# EAGLE board Nepixel_MIC_1_ESP8266_12 (EAGLE 6.3)
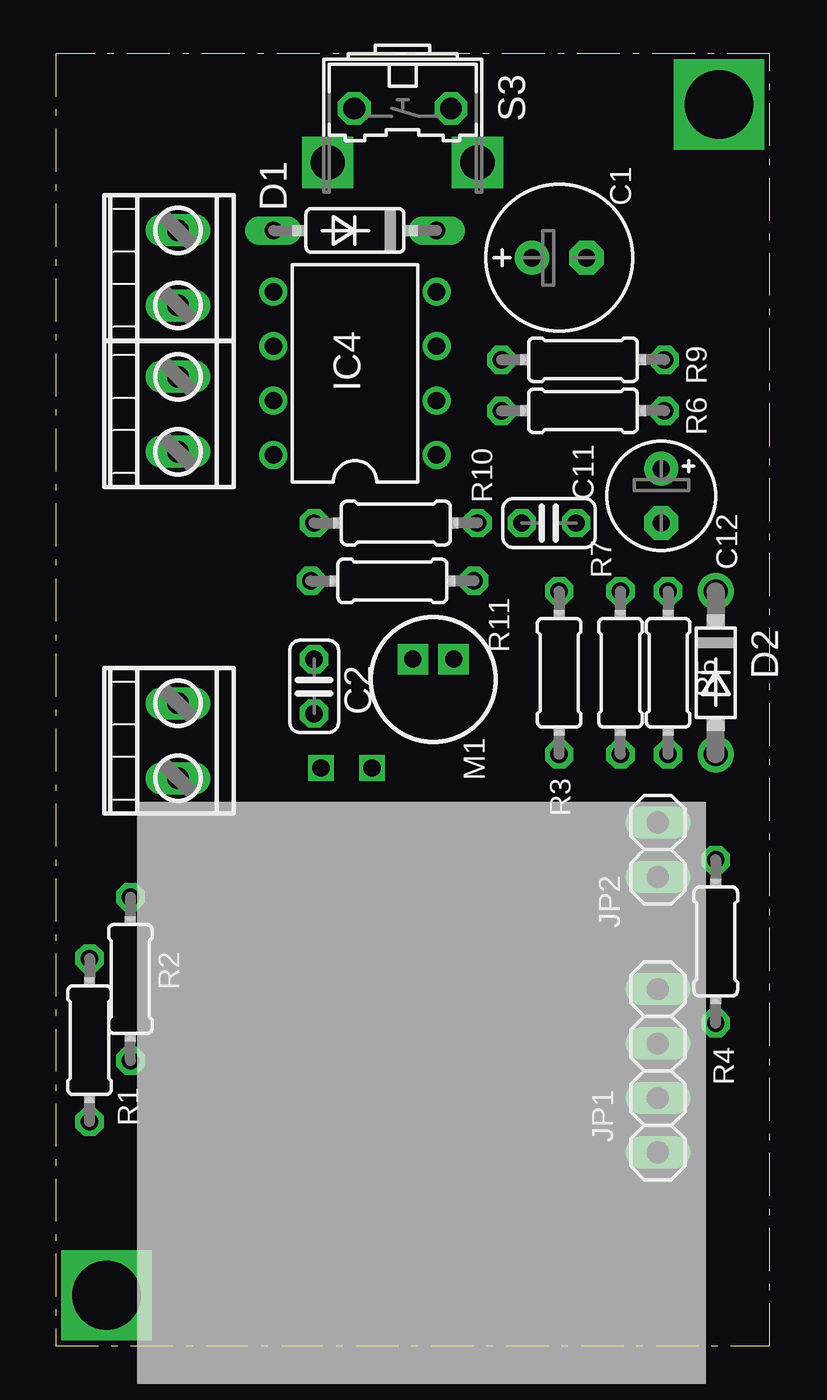
[diagram p0: board, top side]
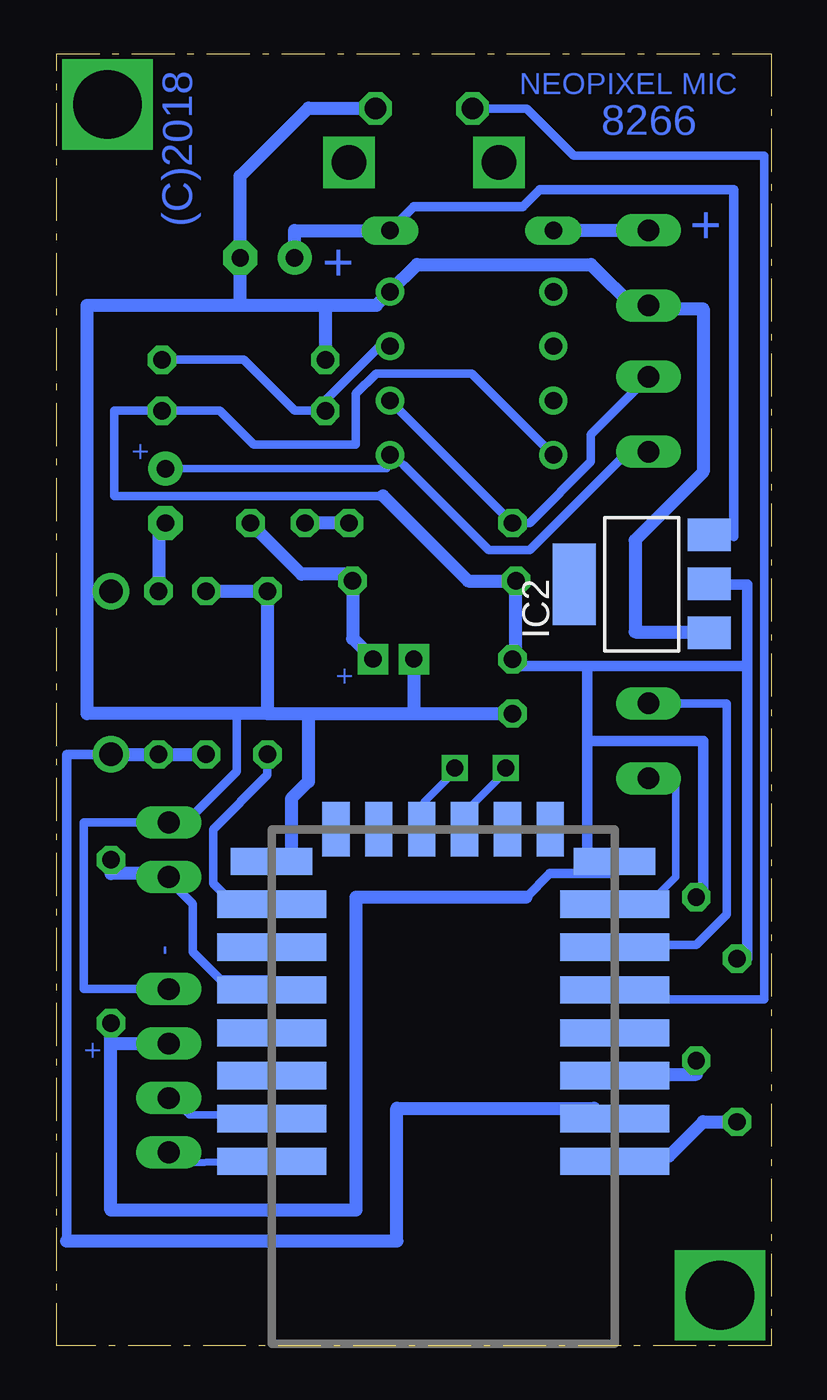
[diagram p1: board, bottom side, seen from below]

Size 33.33 x 60.3 mm. Coordinates in mm from the lower left corner, seen from the top.
Outline: 0,60.3 0,0 33.33,0 33.33,60.3 0,60.3
Copper layers (1*16): Top 0.035mm / dielectric 1.5mm / Bottom 0.035mm
Design rules "default *": minimum track width 14mil, minimum drill 24mil, track to track 8mil, track to pad 8mil, pad to pad 8mil, via to via 8mil, smd to smd 8mil, copper to edge 8mil, drill to drill 8mil, minimum pad ring 10mil, minimum via ring 8mil, stop-mask expansion 4mil, vias tented up to drill 0mil, thermal gap 10mil

## Footprints (pad centres in the part's own frame; a part is rotated, then mirrored left to right if it is on the bottom)
E2,5-7 = drill 0.813 pad 1.6: + -1.27,0 | drill 0.813 pad 1.6 octagon: - 1.27,0
C025-024X044 = drill 0.813 octagon: 1 -1.27,0; 2 1.27,0
E2,5-5 = drill 0.813 pad 1.6: + -1.27,0 | drill 0.813 pad 1.6 octagon: - 1.27,0
DO35-7 = drill 0.813 long: A 3.81,0; C -3.81,0
DO41-7.6 = drill 1.1 pad 1.7: A 3.81,0; C -3.81,0
SOT223 = smd 1.499 x 2.007: 1 -2.261,-3.15; 2 0.025,-3.15; 3 2.311,-3.15 | smd 3.81 x 2.007: 4 0,3.15
DIL08 = drill 0.813 pad 1.27: 1 -3.81,-3.81; 2 -1.27,-3.81; 3 1.27,-3.81; 4 3.81,-3.81; 5 3.81,3.81; 6 1.27,3.81; 7 -1.27,3.81; 8 -3.81,3.81
1X04 = drill 1.016 long: 1 -3.81,0; 2 -1.27,0; 3 1.27,0; 4 3.81,0
1X02 = drill 1.016 long: 1 -1.27,0; 2 1.27,0
WM-64PN = drill 0.6 pad 1: 1 -1,0.95; 2 -1,-0.95
0204/7 = drill 0.813 octagon: 1 -3.81,0; 2 3.81,0
B3F-31XX = drill 1.016 octagon: 1 -2.261,-1.245; 2 2.261,-1.245 | drill 1.499 pad 2.159: 3 -3.505,1.245; 4 3.505,1.245
ESP826612F = smd 5.08 x 1.27: ADC 0,13.5; EN 0,11.5; GPIO0 16,7.5; GPIO2 16,5.5; GPIO4 16,9.5; GPIO5 16,11.5; GPIO12 0,5.5; GPIO13 0,3.5; GPIO14 0,7.5; GPIO15 16,3.5; GPIO16 0,9.5; RST 0,15.5; RXD 16,13.5; TXD 16,15.5 | smd 1.27 x 2.54: CSO 3,0; GPIO9 7,0; GPIO10 9,0; MISO 5,0; MOSI 11,0; SCLK 13,0 | smd 3.81 x 1.27: GND 16,1.5; VCC 0,1.5
AK550/2 = drill 1 pad 1.5 long: 1 -1.75,0; 2 1.75,0

## Placement (x,y rotation side)
C1  330uF/6.3  [E2,5-7]  23.5,50.78 0 top
C2  M1  [C025-024X044]  12.06,30.78 270 top
C11  M1  [C025-024X044]  23.02,38.4 180 top
C12  4M7  [E2,5-5]  28.26,39.67 270 top
D1  BA159  [DO35-7]  13.97,52.05 180 top
D2  KA261  [DO41-7.6]  30.8,31.41 270 top
IC2  REG1117  [SOT223]  6.03,35.54 90 bottom
IC4  LM358N  [DIL08]  13.97,45.38 90 top
JP1  [1X04]  28.1,12.84 90 top
JP2  [1X02]  28.1,23.16 90 top
M1  mic  [WM-64PN]  17.62,31.09 270 top
R1  10k  [0204/7]  1.59,14.27 90 top
R2  10k  [0204/7]  3.49,17.12 90 top
R3  10k  [0204/7]  23.5,31.41 270 top
R4  10k  [0204/7]  30.8,18.87 90 top
R5  100k  [0204/7]  28.57,31.41 270 top
R6  10k  [0204/7]  24.61,43.64 0 top
R7  100k  [0204/7]  26.35,31.41 270 top
R9  10k  [0204/7]  24.61,46.02 0 top
R10  1k  [0204/7]  15.88,38.4 0 top
R11  10k  [0204/7]  15.72,35.7 180 top
S3  [B3F-31XX]  16.19,56.49 180 top
U$1  ESP826612F  [ESP826612F]  7.3,24.11 180 bottom
X1  UCC  [AK550/2]  5.71,50.3 270 top
X3  OUT  [AK550/2]  5.71,28.24 270 top
X4  pot1  [AK550/2]  5.71,43.48 270 top

## Library data of the parts
C1 C2 C11 C12 R1-R7 R9-R11 = resistor
D1 D2 = diode
IC2 = burr-brown; MPN: REG1117; OC_FARNELL: 1097566; OC_NEWARK: 14P6981
IC4 = linear
JP1 JP2 = pinhead
M1 = microphon
S3 = switch-omron; MPN: B3F-3100; OC_FARNELL: 959704; OC_NEWARK: 36M3582
U$1 = ESP8266
X1 X3 X4 = con-ptr500; OC_FARNELL: unknown; OC_NEWARK: unknown

## Nets
GND: C1.- C2.2 D2.C IC2.1 IC4.4 JP1.4 JP2.2 M1.2 R3.1 R7.1 R9.1 S3.1 U$1.GND X1.2
N$1: D1.A X1.1
N$2: S3.2 U$1.GPIO14
N$4: JP1.1 U$1.TXD
N$5: JP1.2 U$1.RXD
N$7: JP2.1 R4.2 U$1.GPIO0
N$8: U$1.GPIO13 X3.2
N$9: R1.1 U$1.RST
N$10: U$1.GPIO12 X3.1
N$11: R2.1 U$1.EN
N$12: R3.2 U$1.GPIO15
N$15: C12.- R5.1
N$21: C1.+ D1.C IC2.3
N$25: C2.1 IC2.2 IC4.8 JP1.3 R1.2 R2.2 R4.1 R6.2 R11.2 U$1.VCC
N$61: IC4.2 R10.1 X4.1
N$62: IC4.3 R6.1 R9.2
N$63: C11.2 R10.2
N$64: C11.1 M1.1 R11.1
N$65: D2.A R5.2 R7.2 U$1.ADC
N$66: C12.+ IC4.1 X4.2

## Tracks (layer width: path | path; a pad name or v marks a point on that pad's centre or on a via)
GND
  Bottom 0.356: 4.92,48.4 X1.2 | 22.38,22.84 23.18,22.84 U$1.GND | 18.41,57.76 S3.1 | 2.54,33.32 IC2.1 2.86,33.32 | 16.67,31.73 16.64,31.58 | 16.64,31.58 16.67,32.21 | M1.2 16.64,31.62 16.64,31.58 | 31.91,35.22 D2.C
  Bottom 0.406: JP1.4 32.07,16.65 32.07,24.43 JP2.2 27.3,24.43 24.92,26.81 24.92,29.51
  Bottom 0.6: 16.67,32.21 16.67,29.51 | 21.59,26.33 21.59,29.51 23.5,29.51
  Bottom 0.61: 20.8,48.56 18.41,48.56 IC4.4 16.51,50.46 8.41,50.46 6.35,48.4 4.92,48.4 3.17,48.4 3.17,40.78 6.35,37.6 6.35,33.32 2.86,33.32 | 24.77,48.56 20.8,48.56 | 20.8,48.56 R9.1 | 21.59,26.33 22.38,25.54 22.38,22.84 | 21.59,29.51 16.67,29.51 C2.2 | R7.1 R3.1 23.5,29.51 24.92,29.51 31.91,29.51 31.91,35.22 31.91,48.56 24.77,48.56 | 24.77,48.56 C1.- 24.77,54.59 21.59,57.76 18.41,57.76
N$1
  Bottom 0.356: X1.1 5.87,52.05
  Bottom 0.61: 5.87,52.05 D1.A
N$2
  Bottom 0.356: 4.76,16.17 5.4,16.81 7.11,16.81 U$1.GPIO14
  Bottom 0.406: S3.2 11.4,57.74 9.21,55.54 0.32,55.54 0.32,16.17 4.76,16.17
N$3  (via drill 0.8)
  other vias: 14.76,26.97
N$4
  Bottom 0.356: JP1.1 27.94,8.55 U$1.TXD
N$5
  Bottom 0.356: JP1.2 27.15,10.78 25.72,10.78 U$1.RXD
N$6  (via drill 0.8)
  other vias: 12.38,26.97
N$7
  Bottom 0.356: 28.42,22.05 JP2.1 28.1,22.05 | 25.72,17.12 23.5,17.12 23.5,16.81 U$1.GPIO0
  Bottom 0.406: 28.42,22.05 26.99,20.62 26.99,18.39 25.72,17.12
  Bottom 0.61: 28.1,22.05 30.8,22.05 R4.2
N$8
  Bottom 0.356: X3.2 5.4,26.33 4.45,26.33 4.45,21.89 5.4,20.93 6.03,20.93 6.03,20.62 U$1.GPIO13
N$9
  Bottom 0.356: 4.76,8.87 5.08,8.87 7.3,8.55 U$1.RST
  Bottom 0.61: 4.76,8.87 3.17,10.46 R1.1
N$10
  Bottom 0.356: X3.1 | 7.3,18.71 U$1.GPIO12
  Bottom 0.406: X3.1 2.06,29.98 2.06,20.14 3.49,18.71 7.3,18.71
N$11
  Bottom 0.356: 7.3,12.68 U$1.EN
  Bottom 0.61: 7.3,12.68 3.49,12.68 R2.1
N$12
  Bottom 0.356: 25.08,20.62 23.5,20.62 U$1.GPIO15
  Bottom 0.406: R3.2 23.5,26.65 26.04,24.11 26.04,21.57 25.08,20.62
N$13  (via drill 0.8 pad 1.42)
  other vias: 16.67,32.05
N$14  (via drill 0.8 pad 1.42)
  other vias: 18.57,32.05
N$15
  Bottom 0.356: C12.- 28.57,38.4
  Bottom 0.61: 28.57,38.4 R5.1
N$16  (via drill 1.6)
  other vias: 12.7,55.22
N$17  (via drill 1.6)
  other vias: 19.68,55.22
N$19
  Bottom 0.356: 12.38,26.97 12.38,26.81 14.29,24.9
N$20
  Bottom 0.356: 14.76,26.97 14.61,26.97 16.19,25.38 16.19,24.75
N$21
  Bottom 0.356: 1.75,37.76 2.54,37.76 IC2.3
  Bottom 0.406: 11.59,53.16 10.79,53.95
  Bottom 0.45: 1.75,37.76 1.75,53.95 10.79,53.95 | 11.59,53.16 16.67,53.16 D1.C
  Bottom 0.61: D1.C 22.23,52.05 C1.+
N$25
  Bottom 0.356: 1.11,18.08 R1.2 | 8.57,22.52 U$1.VCC 7.3,22.05 | 3.17,20.93 R2.2 | 2.54,35.54 IC2.2 | 12.06,31.73 C2.1
  Bottom 0.406: 18.1,39.67 30.64,39.67 30.64,43.64 R6.2 25.72,43.64 24.13,42.05 19.37,42.05 19.37,44.43 18.41,45.38 13.97,45.38 IC4.8
  Bottom 0.45: 7.3,22.05 10.32,22.05 11.43,20.93
  Bottom 0.5: 1.11,31.73 1.11,18.08 | 8.57,31.73 1.11,31.73 | 8.57,22.52 8.57,28.24 | 8.57,28.24 8.57,31.73 | 3.17,20.93 3.17,28.24 8.57,28.24 | 2.54,35.54 1.11,35.54 1.11,31.73 | 12.06,31.73 8.57,31.73
  Bottom 0.61: 18.1,39.67 14.13,35.7 R11.2 11.91,32.05 C2.1 | 30.8,14.11 JP1.3 | 30.8,14.11 30.8,6.33 19.37,6.33 19.37,20.93 11.43,20.93 | 30.8,14.11 R4.1
N$32  (via drill 3.2)
  other vias: 2.38,2.36
N$33  (via drill 3.2)
  other vias: 30.96,57.92
N$61
  Bottom 0.356: X4.1
  Bottom 0.406: X4.1 8.41,42.52 8.41,41.25 11.27,38.4 R10.1
  Bottom 0.45: R10.1 IC4.2
N$62
  Bottom 0.356: R6.1 20.8,44.11 | 18.26,46.65 IC4.3
  Bottom 0.406: 20.8,44.11 18.26,46.65 | R9.2 24.61,46.02 22.23,43.64 R6.1
N$63
  Bottom 0.61: R10.2 C11.2
N$64
  Bottom 0.356: R11.1 19.53,36.02 | M1.1 18.53,32.05
  Bottom 0.61: 19.53,36.02 21.91,36.02 C11.1 | R11.1 19.53,33 18.53,32.05
N$65
  Bottom 0.356: 8.26,11.09 8.26,10.61 U$1.ADC
  Bottom 0.45: 32.86,4.9 32.86,27.6 D2.A
  Bottom 0.61: R7.2 R5.2 D2.A | 32.86,4.9 17.46,4.9 17.46,11.09 8.26,11.09
N$66
  Bottom 0.356: C12.+ 17.94,40.94 17.78,41.25 IC4.1 17.14,41.1 | 6.67,41.73 X4.2
  Bottom 0.406: 6.67,41.73 11.27,37.13 13.18,37.13 17.14,41.1

## Text on the board
Bottom: (C)2018 | NEOPIXEL MIC | 8266 | + | + | + | + | - | +
tValues: + | - | POTENC. | OUT PIXEL | IN TL